# Altium PCB 7798-20-0228.PcbDoc (part 1 of 2)
Units mil, origin at the board's own origin, x right, y up, seen from the top; angles counter-clockwise.
Board outline 3346.46 x 2125.98 mil, 6 copper layers (Top Signal, Ground Plane (GND), Inner Layer 1, Inner Layer 2, Power Plane (VCC), Bottom Signal), stack 51.068 mil thick; 141 components, 100 nets, 613 pads, 275 vias.
Unrouted connection lines stored in the file: 12.
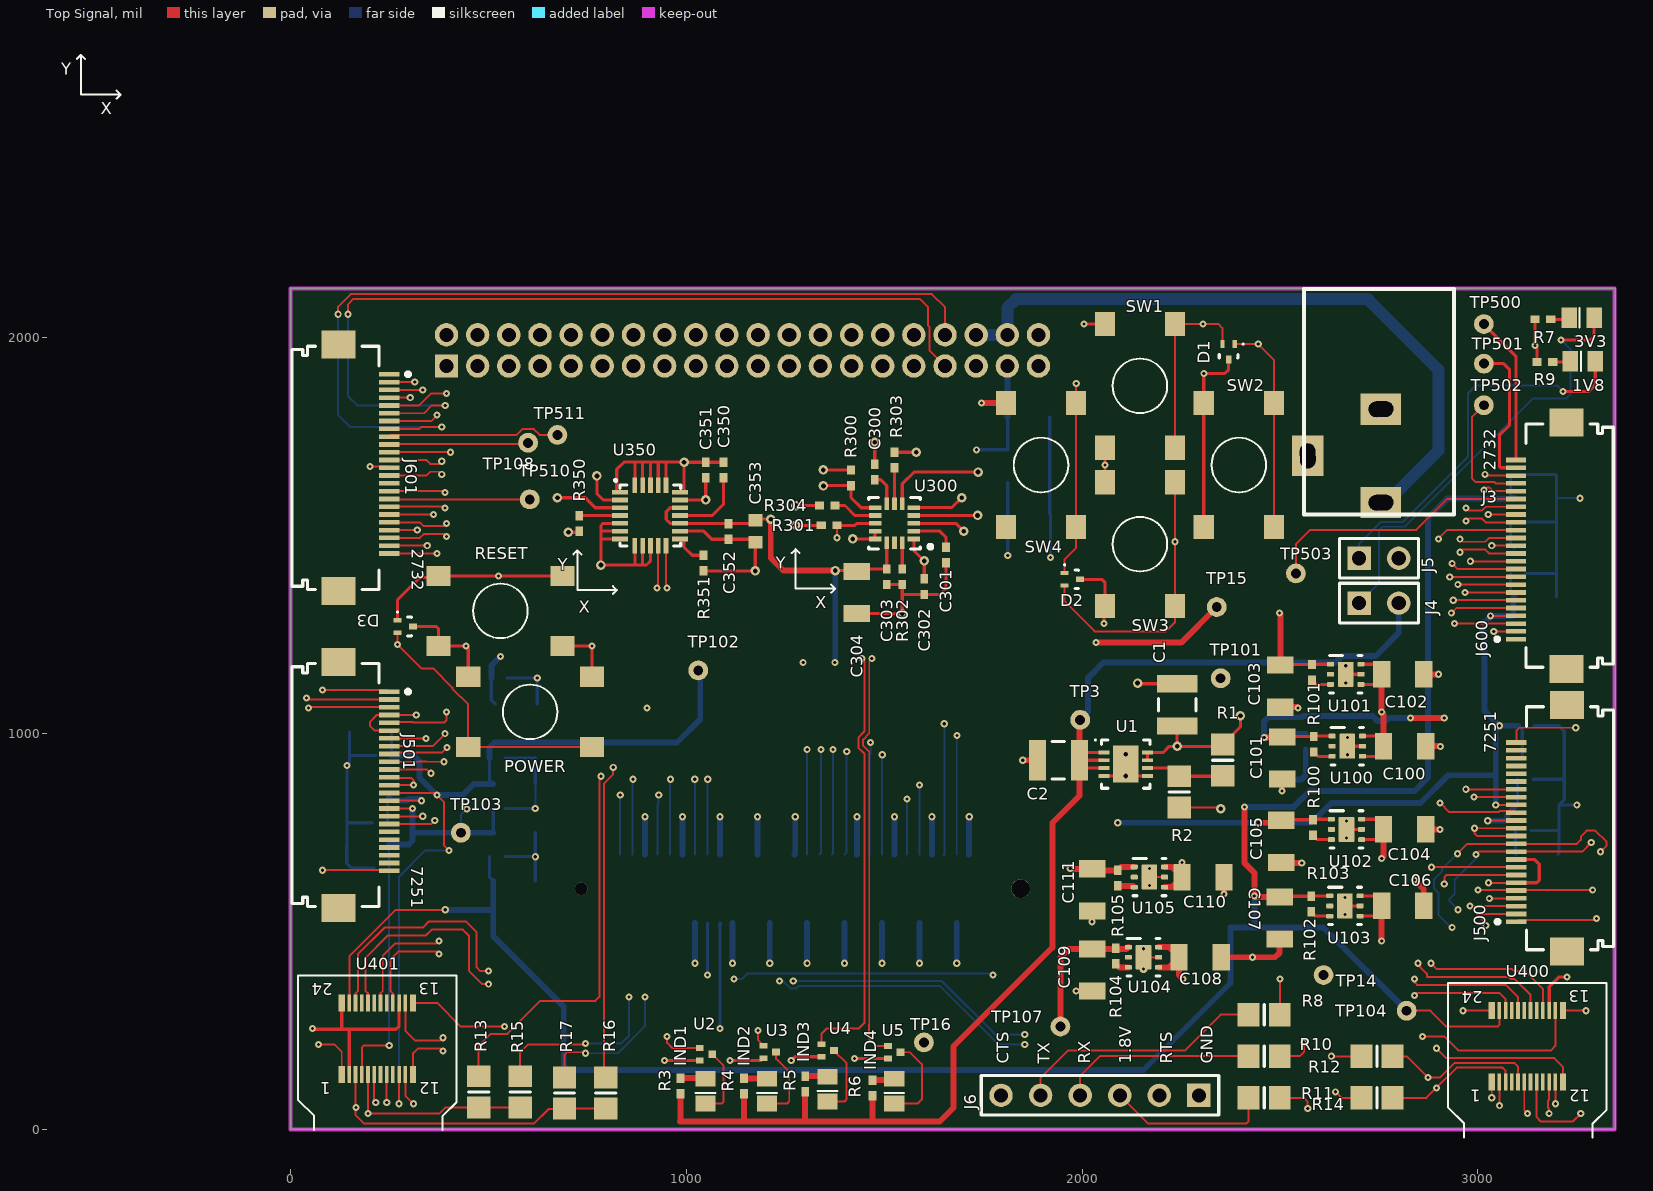
[diagram p0: Top Signal view]
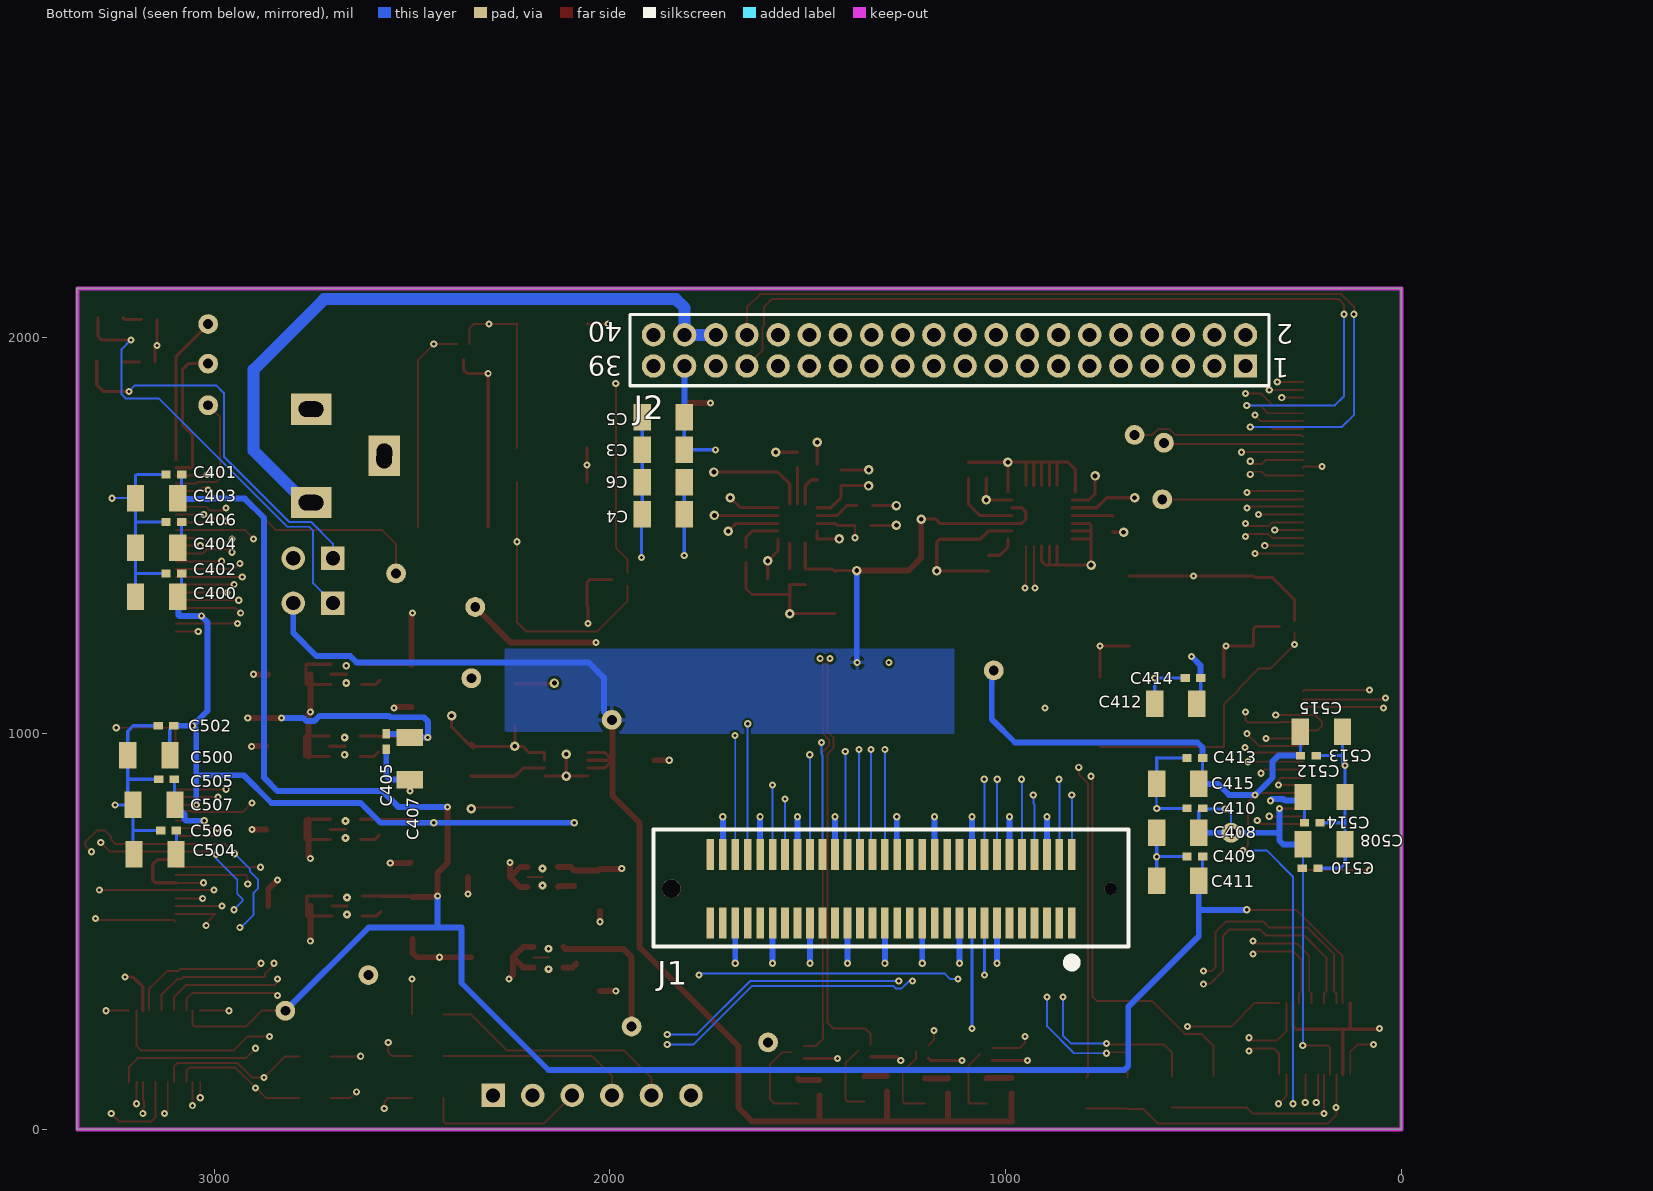
[diagram p1: Bottom Signal view, seen from below]
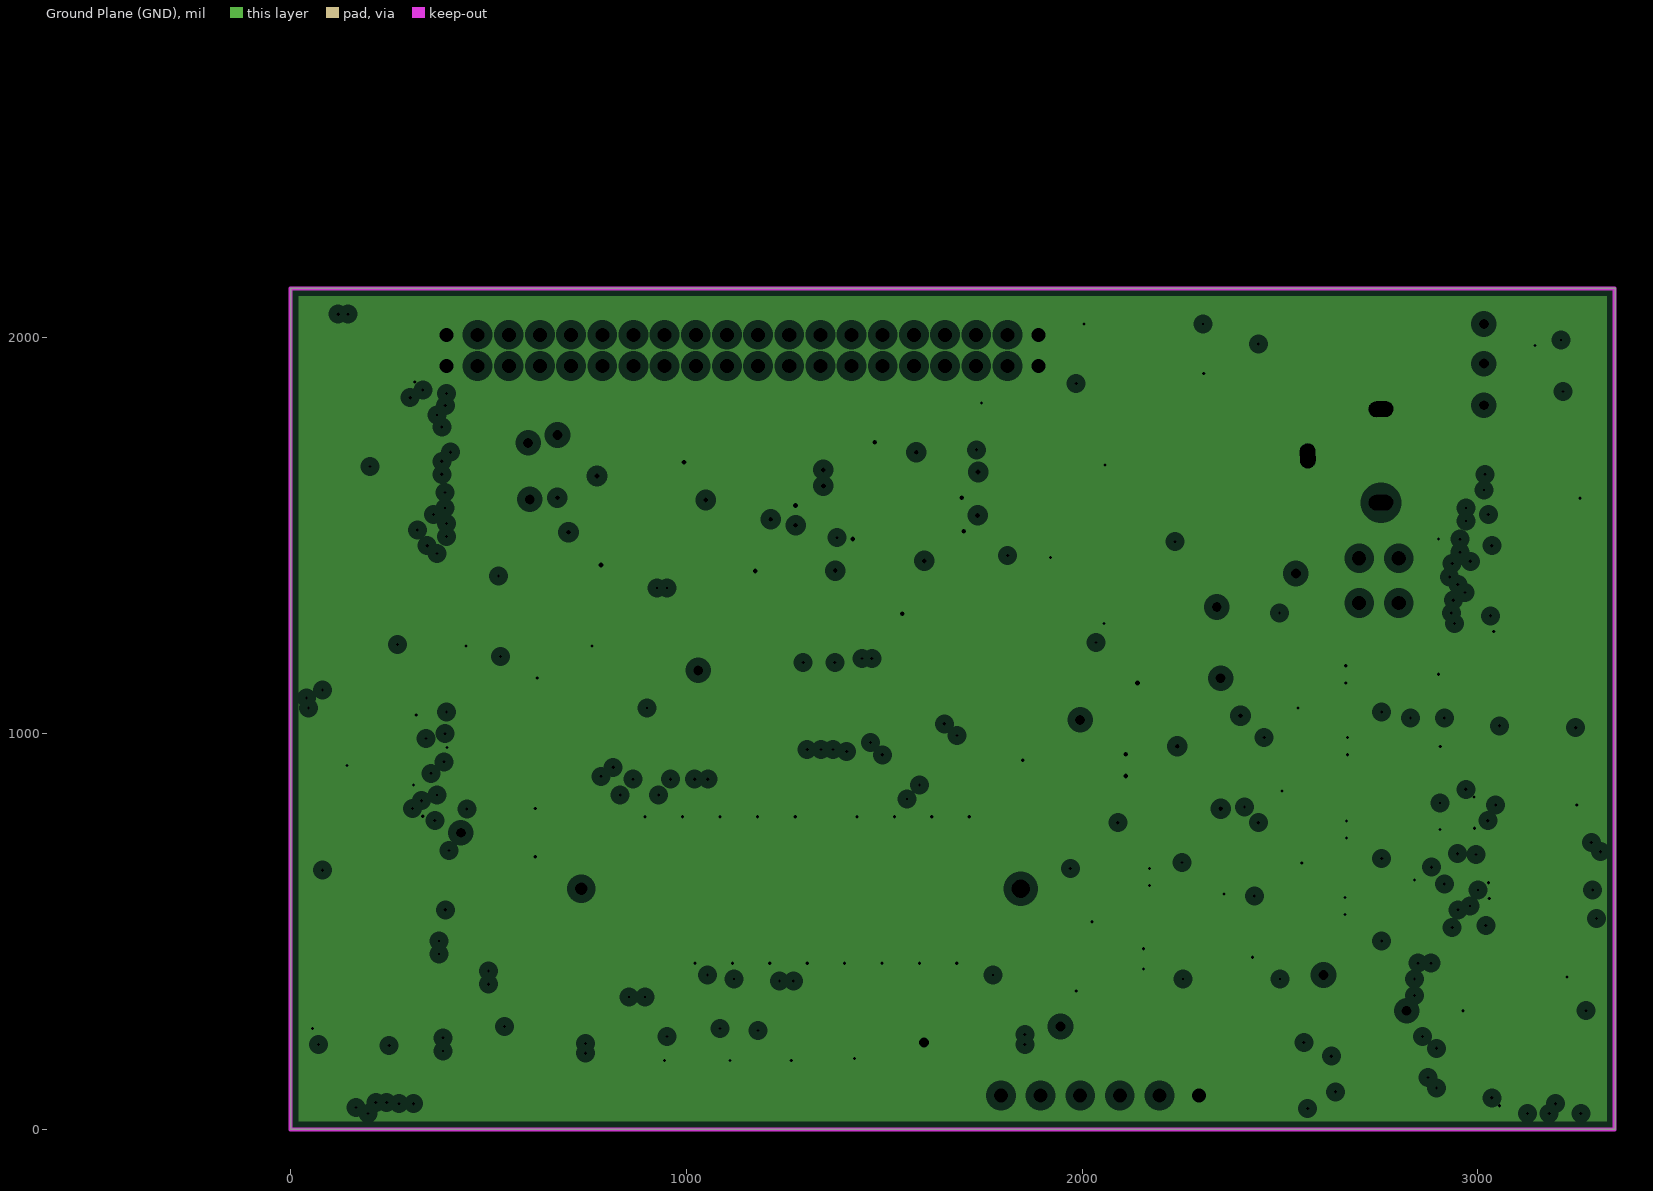
[diagram p2: Ground Plane (GND), clearances drawn from the general rule]
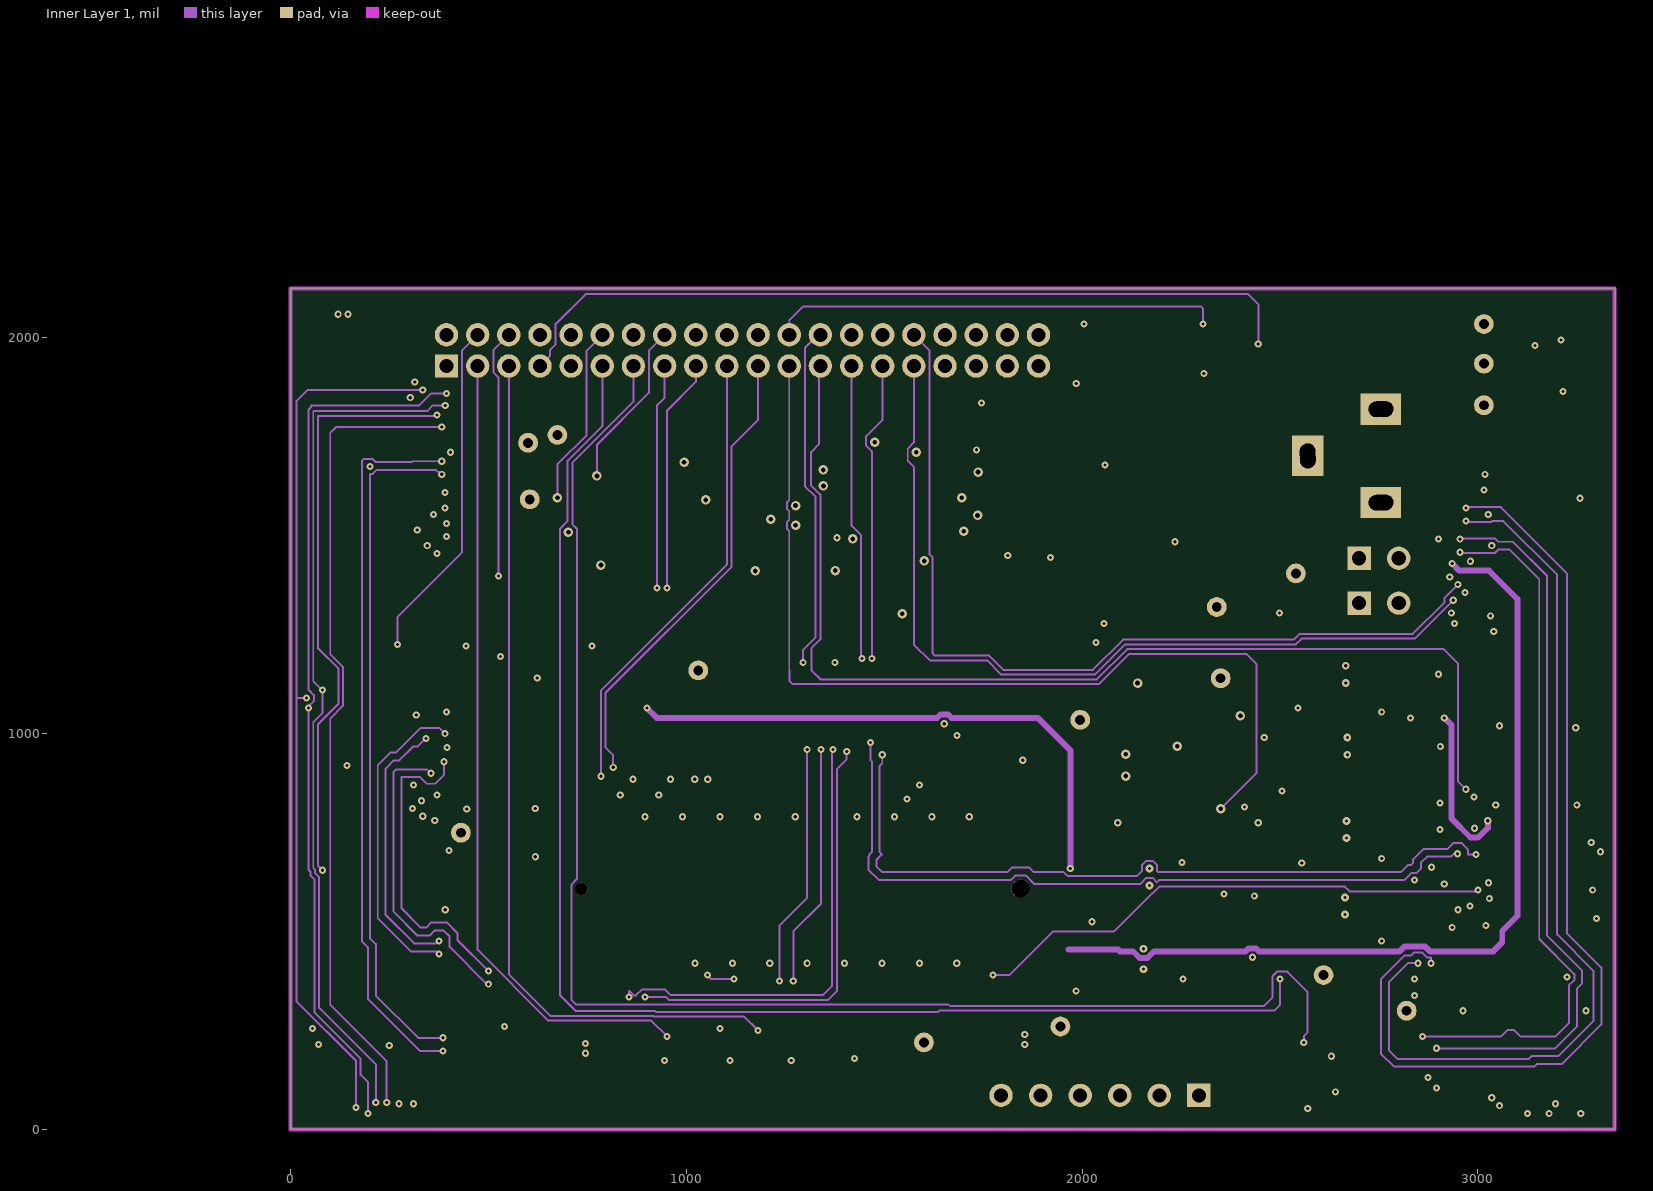
[diagram p3: Inner Layer 1]
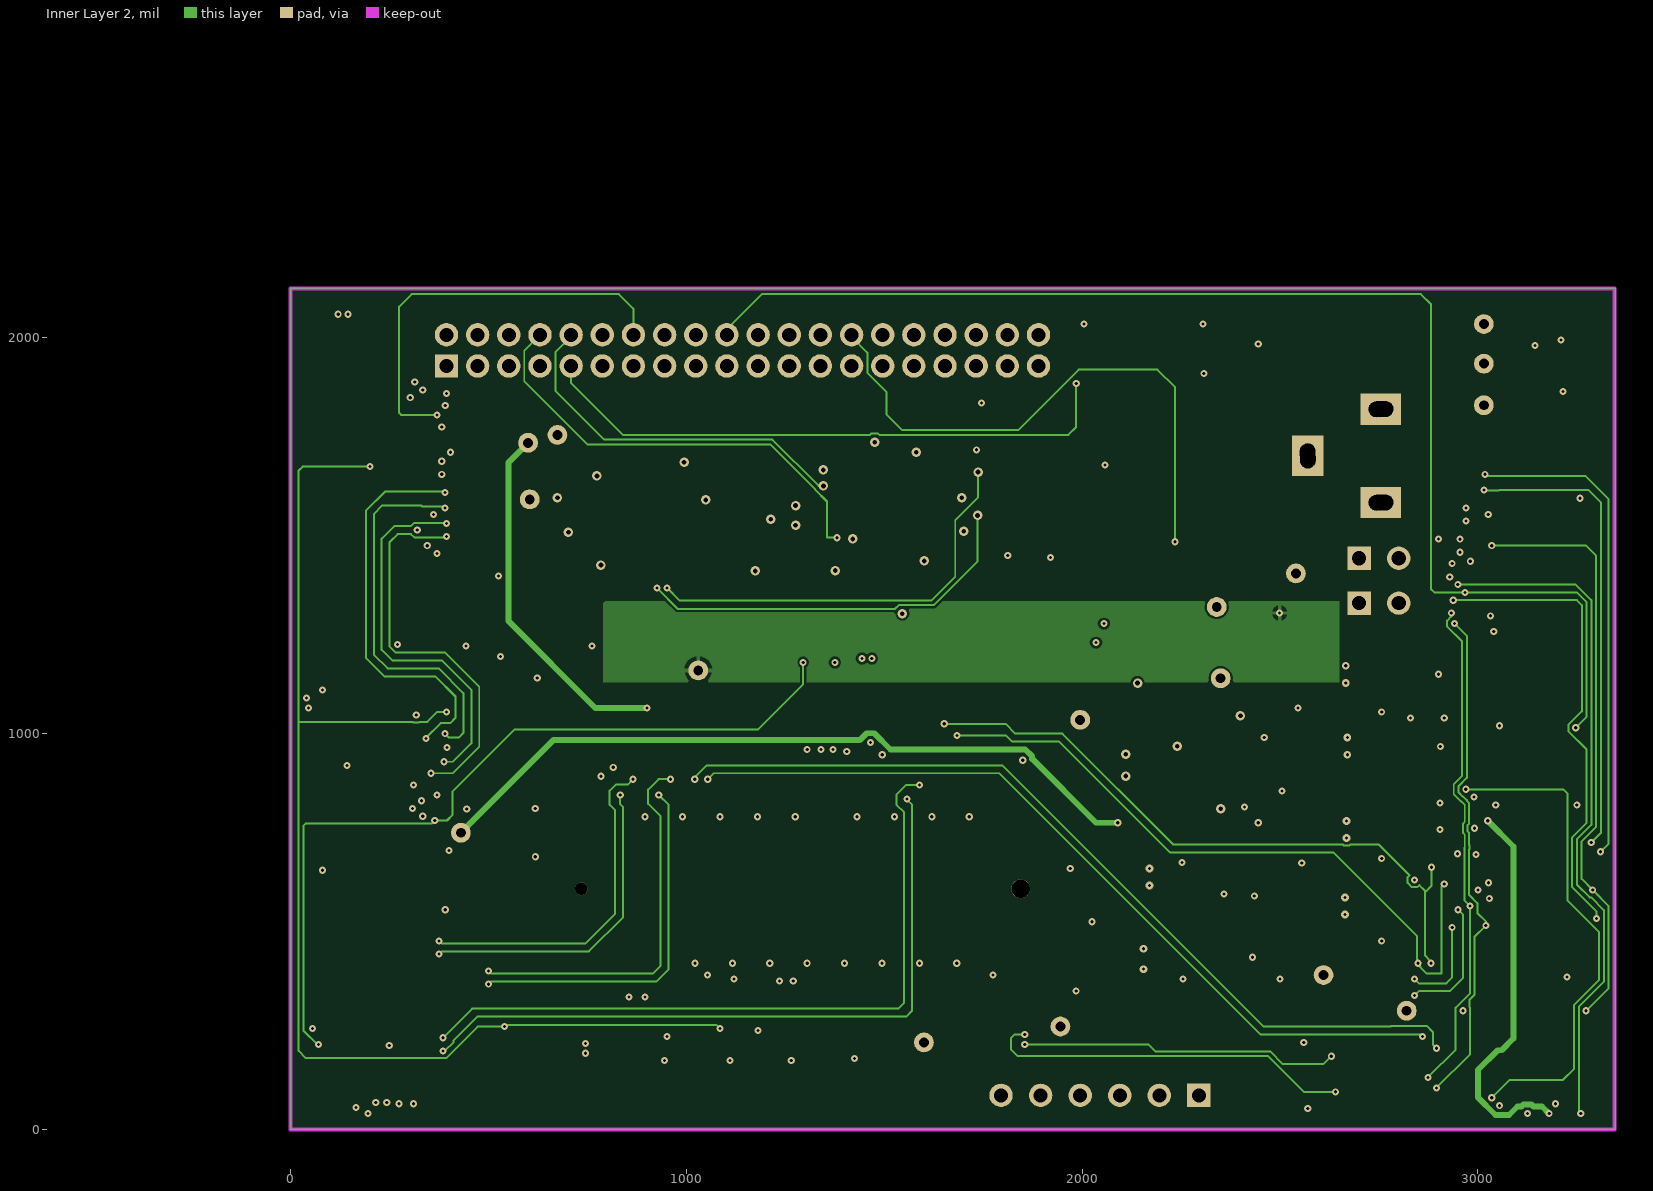
[diagram p4: Inner Layer 2]
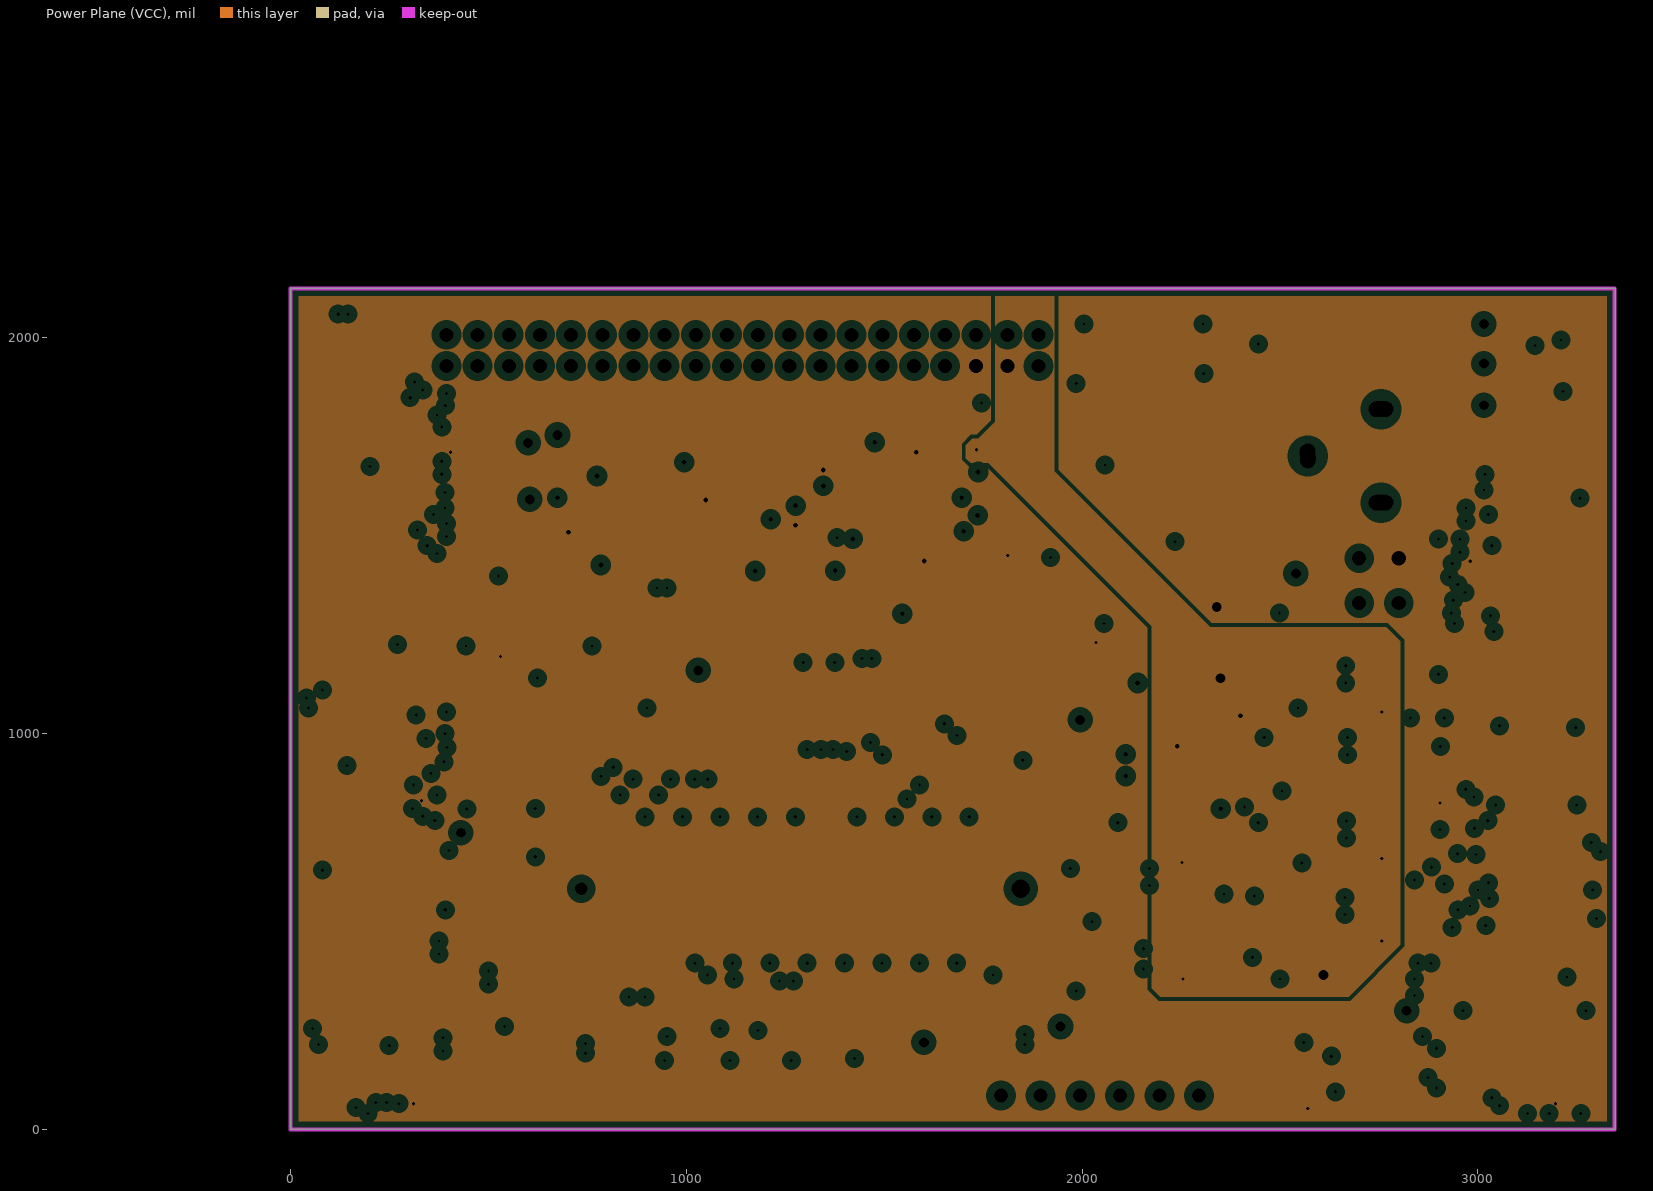
[diagram p5: Power Plane (VCC), clearances drawn from the general rule]

## Layer stack, top to bottom
Top Solder: solder mask 0.4, Solder Resist, Dk 3.5
Top Signal: signal copper 1.4
Dielectric 1: core 12.6, FR-4, Dk 4.8
Ground Plane (GND): plane copper 1.417, net sGND
Dielectric 3: prepreg 5, Dk 4.2
Inner Layer 1: signal copper 1.417
Dielectric 6: core 10, Dk 4.2
Inner Layer 2: signal copper 1.417
Dielectric 5: prepreg 5, Dk 4.2
Power Plane (VCC): plane copper 1.417, net sPWR_1V8
Dielectric 4: core 10, Dk 4.2
Bottom Signal: signal copper 1.4
Bottom Solder: solder mask 0.4, Solder Resist, Dk 3.5

## Board outline
0,0 3346.46,0 3346.46,2125.98 0,2125.98

## Design rules (kind name [scope] priority, off if disabled: settings)
AcuteAngle [All] p1: minimum=6.00000000000000E+0001 checktracksonly=FALSE
Clearance Clearance_2 [InNet('SCAM0_DATA0_N') OR InNet('SCAM0_DATA0_P') OR InNet('SCAM0_DATA1_N')OR InNet('SCAM0_DATA1_P') OR InNet('SCAM1_MCLOCK_N')OR InNet('SCAM1_MCLOCK_P') OR InNet('SCAM1_DATA0_N') OR InNet('SCAM1_DATA0_P')OR InNet('SCAM1_DATA1_N')OR InNet('SCAM1_DATA1_P') vs InNet('SCAM0_DATA0_N') OR InNet('SCAM0_DATA0_P') OR InNet('SCAM0_DATA1_N')OR InNet('SCAM0_DATA1_P') OR InNet('SCAM1_MCLOCK_N')OR InNet('SCAM1_MCLOCK_P') OR InNet('SCAM1_DATA0_N') OR InNet('SCAM1_DATA0_P')OR InNet('SCAM1_DATA1_N')OR InNet('SCAM1_DATA1_P')] p1: gap=15
Clearance Clearance_1 [(HasFootprint('SMD QFN 24_4X4MM 7/5') OR HasFootprint('FREE-QFN-16-3000X3000DE_V'))] p2: gap=8
Clearance [All] p3: gap=6
DiffPairsRouting DiffPair_SCAM0DiffPairsRouting [InDifferentialPair ('SCAM1_DATA0')] p1: maxlimit=10 minlimit=10 mostfreqgap=10 toplayer_minwidth=15 toplayer_maxwidth=15 toplayer_prefwidth=15 midlayer1_minwidth=15 midlayer1_maxwidth=15 midlayer1_prefwidth=15 midlayer2_minwidth=15 midlayer2_maxwidth=15 midlayer2_prefwidth=15 bottomlayer_minwidth=15 bottomlayer_maxwidth=15 bottomlayer_prefwidth=15 maxuncoupledlength=500
DiffPairsRouting [All] p2: maxlimit=17 minlimit=8 mostfreqgap=15 toplayer_minwidth=5 toplayer_maxwidth=10 toplayer_prefwidth=7 midlayer1_minwidth=5 midlayer1_maxwidth=10 midlayer1_prefwidth=7 midlayer2_minwidth=5 midlayer2_maxwidth=10 midlayer2_prefwidth=7 bottomlayer_minwidth=5 bottomlayer_maxwidth=10 bottomlayer_prefwidth=7 maxuncoupledlength=500
MatchedLengths DiffPair_SCAM0MatchedLengths [InDifferentialPair ('SCAM1_DATA0')] p1: tolerance=26 checknetsindiffpair=FALSE checkdiffpairvsdiffpair=TRUE checkxsignals=TRUE checkothers=TRUE
MatchedLengths [InDifferentialPairClass('All Differential Pairs')] p2: tolerance=26 checknetsindiffpair=TRUE checkdiffpairvsdiffpair=FALSE checkxsignals=FALSE checkothers=FALSE
MaxMinImpedance [InNet('SCAM0_DATA0_N') OR InNet('SCAM0_DATA0_P') OR InNet('SCAM0_DATA1_N')OR InNet('SCAM0_DATA1_P') OR InNet('SCAM1_MCLOCK_N')OR InNet('SCAM1_MCLOCK_P') OR InNet('SCAM1_DATA0_N') OR InNet('SCAM1_DATA0_P')OR InNet('SCAM1_DATA1_N')OR InNet('SCAM1_DATA1_P')] p1: minimum=10.00 maximum=110.0
MinimumAnnularRing [All] p1: minimumring=8
PlaneClearance [All] p1: clearance=20
PlaneConnect [All] p1: planeconnectstyle=Relief reliefexpansion=20 reliefentries=4 reliefconductorwidth=10 reliefairgap=10
PolygonConnect [All] p1: connectstyle=Relief reliefconductorwidth=10 reliefentries=4 polygonreliefangle="90 Angle" airgapwidth=10
RoutingVias [All] p1: holewidth=10 width=20 viastyle="Through Hole" minholewidth=8 minwidth=18 maxholewidth=12 maxwidth=24
SolderMaskExpansion [All] p1: expansion=4
Width Width_2 [InNet('SCAM0_DATA0_N') OR InNet('SCAM0_DATA0_P') OR InNet('SCAM0_DATA1_N')OR InNet('SCAM0_DATA1_P') OR InNet('SCAM1_MCLOCK_N')OR InNet('SCAM1_MCLOCK_P') OR InNet('SCAM1_DATA0_N') OR InNet('SCAM1_DATA0_P')OR InNet('SCAM1_DATA1_N')OR InNet('SCAM1_DATA1_P')] p1: maxlimit=10 minlimit=5 preferedwidth=7
Width Width_1 [InNet('sSYS_DCIN')] p2: maxlimit=30 minlimit=8 preferedwidth=8
Width [All] p3: maxlimit=15 minlimit=5 preferedwidth=8
27 further rules are at their usual default settings.

## Classes and differential pairs
differential pair SCAM0_DATA0: +SCAM0_DATA0_P -SCAM0_DATA0_N
differential pair SCAM0_DATA1: +SCAM0_DATA1_P -SCAM0_DATA1_N
differential pair SCAM1_DATA1: +SCAM1_DATA1_P -SCAM1_DATA1_N
differential pair SCAM1_MCLOCK: +SCAM1_MCLOCK_P -SCAM1_MCLOCK_N

## Components (designator, comment, footprint, x,y, rotation, side; value= is the part's Value field where it differs from the comment)
1V8 "LTST-C171GKT" 0805 3265,1941 r180 top
3V3 "LTST-C171GKT" 0805 3262,2051 r180 top
C1 "GRM32ER71H106KA12L" 1210 2240,1073 r270 top
C2 "GRM32ER71H106KA12L" 1210 1940,932.84 r0 top
C3 "GRM31CR71H475KA12L" 1206 1865,1717.28 r180 bottom
C4 "GRM31CR71H475KA12L" 1206 1865,1555 r180 bottom
C5 "GRM31CR71H475KA12L" 1206 1865,1800 r180 bottom
C6 "GRM31CR71H475KA12L" 1206 1865,1635 r180 bottom
C100 "GRM31CR71H475KA12L" 1206 2815,968.43 r180 top
C101 "GRM31CR71H475KA12L" 1206 2505,938.35 r90 top
C102 "GRM31CR71H475KA12L" 1206 2810,1150.06 r180 top
C103 "GRM31CR71H475KA12L" 1206 2501,1120.06 r90 top
C104 "GRM31CR71H475KA12L" 1206 2815,758 r180 top
C105 "GRM31CR71H475KA12L" 1206 2503,728 r90 top
C106 "GRM31CR71H475KA12L" 1206 2810,565 r180 top
C107 "GRM31CR71H475KA12L" 1206 2499,534.58 r90 top
C108 "GRM31CR71H475KA12L" 1206 2298.15,435 r180 top
C109 "GRM31CR71H475KA12L" 1206 2025,403 r90 top
C110 "GRM31CR71H475KA12L" 1206 2305,637.72 r180 top
C111 "GRM31CR71H475KA12L" 1206 2025,605.38 r90 top
C300 "GRM155R71A104KA01D" 0402 1475.79,1661.46 r90 top
C301 "GRM155R71A104KA01D" 0402 1655.79,1451.46 r270 top
C302 "GRM155R71A104KA01D" 0402 1600.79,1371.46 r90 top
C303 "GRM155R71A104KA01D" 0402 1506.1,1396.46 r90 top
C304 "GRM31CR71H475KA12L" 1206 1430.79,1356.46 r90 top
C350 "GRM155R71A104KA01D" 0402 1094,1666.15 r90 top
C351 "GRM155R71A104KA01D" 0402 1049,1666.15 r270 top
C352 "GRM155R71A104KA01D" 0402 1106.13,1511.15 r90 top
C353 "GRM188R71A105KA61J" 0603 1174,1511.78 r270 top
C400 "GRM31CR71H475KA12L" 1206 3145.12,1346.15 r0 bottom
C401 "GRM155R71A104KA01D" 0402 3101.81,1655 r180 bottom
C402 "GRM155R71A104KA01D" 0402 3101.81,1405 r180 bottom
C403 "GRM31CR71H475KA12L" 1206 3145.12,1595 r0 bottom
C404 "GRM31CR71H475KA12L" 1206 3145.12,1470 r0 bottom
C405 "GRM155R71A104KA01D" 0402 2565,980 r90 bottom
C406 "GRM155R71A104KA01D" 0402 3101.81,1535 r180 bottom
C407 "GRM31CR71H475KA12L" 1206 2505,936.85 r270 bottom
C408 "GRM31CR71H475KA12L" 1206 565,749.61 r0 bottom
C409 "GRM155R71A104KA01D" 0402 521.69,690 r180 bottom
C410 "GRM155R71A104KA01D" 0402 521.69,811.34 r180 bottom
C411 "GRM31CR71H475KA12L" 1206 565,628.31 r0 bottom
C412 "GRM31CR71H475KA12L" 1206 569.92,1075.37 r0 bottom
C413 "GRM155R71A104KA01D" 0402 521.69,938.31 r180 bottom
C414 "GRM155R71A104KA01D" 0402 526.61,1140.37 r180 bottom
C415 "GRM31CR71H475KA12L" 1206 565,873.31 r0 bottom
C500 "GRM31CR71H475KA12L" 1206 3165,945 r0 bottom
C502 "GRM155R71A104KA01D" 0402 3121.69,1020 r180 bottom
C504 "GRM31CR71H475KA12L" 1206 3149.37,695.43 r0 bottom
C505 "GRM155R71A104KA01D" 0402 3120,885 r180 bottom
C506 "GRM155R71A104KA01D" 0402 3115,755.43 r180 bottom
C507 "GRM31CR71H475KA12L" 1206 3151.85,820 r0 bottom
C508 "GRM31CR71H475KA12L" 1206 195.38,720 r180 bottom
C510 "GRM155R71A104KA01D" 0402 230.38,660 r0 bottom
C512 "GRM31CR71H475KA12L" 1206 195,840 r180 bottom
C513 "GRM155R71A104KA01D" 0402 235,944.45 r0 bottom
C514 "GRM155R71A104KA01D" 0402 225,775 r0 bottom
C515 "GRM31CR71H475KA12L" 1206 202.14,1004.45 r180 bottom
D1 "ESD7C5.0DT5G" ONSC-SOT-723-3-631AA-01_V 2370,1965 r270 top
D2 "ESD7C5.0DT5G" ONSC-SOT-723-3-631AA-01_V 1975,1390 r0 top
D3 "ESD7C5.0DT5G" ONSC-SOT-723-3-631AA-01_V 289.29,1270.75 r0 top
IND1 "LTST-C171GKT" 0805 1048,97 r270 top
IND2 "LTST-C171GKT" 0805 1203.33,97 r270 top
IND3 "LTST-C171GKT" 0805 1356.67,102 r270 top
IND4 "LTST-C171GKT" 0805 1525,97 r270 top
J1 "61083-064402LF" 61083-064402LF 832.68,521.65 r0 bottom locked
J2 "TMMH-120-01-F-D" HDR2X20.Metric 393.7,1929.13 r0 bottom locked
J3 "PJ-102AH" PJ-102AH 2755,1701.89 r0 top
J4 "XJ8B-0211" HDR1X2 2700,1330 r0 top
J5 "XJ8B-0211" HDR1X2 2700,1443.32 r0 top
J6 "DNP" HDR1X6 2295,86 r180 top
J500 "FH12-24S-0.5SH" FH12-24S-0.5SH 3161.02,761.02 r90 top locked
J501 "FH12-24S-0.5SH" FH12-24S-0.5SH 185,870 r270 top locked
J600 "FH12-24S-0.5SH" FH12-24S-0.5SH 3160,1475 r90 top locked
J601 "FH12-24S-0.5SH" FH12-24S-0.5SH 185,1671.89 r270 top locked
POWER "PTS645SH50SMTR92 LFS" "PTS645SH50SMTR92 LFS" 605,1055 r0 top
R1 "CRCW08050000Z0EA" 6-0805_M 2355,933 r90 top
R2 "CRCW08050000Z0EA" 6-0805_M 2245,853 r270 top
R3 "CRCW0402560RFKEDHP" 0402 985,110 r270 top
R4 "CRCW0402560RFKEDHP" 0402 1145.79,110 r270 top
R5 "CRCW0402560RFKEDHP" 0402 1300,115 r270 top
R6 "CRCW0402560RFKEDHP" 0402 1470,105 r270 top
R7 "CRCW0402560RFKEDHP" 0402 3164,2047 r180 top
R8 "CRCW08050000Z0EA" 6-0805_M 2460,290 r0 top
R9 "CRCW040256R0FKED" 0402 3169,1939 r180 top
R10 "CRCW08050000Z0EA" 6-0805_M 2460,185 r0 top
R11 "CRCW08050000Z0EA" 6-0805_M 2460,80 r0 top
R12 "CRCW08050000Z0EA" 6-0805_M 2745,184.63 r0 top
R13 "CRCW08050000Z0EA" 6-0805_M 475,95 r270 top
R14 "CRCW08050000Z0EA" 6-0805_M 2745,80 r0 top
R15 "CRCW08050000Z0EA" 6-0805_M 580,95 r270 top
R16 "CRCW08050000Z0EA" 6-0805_M 796,92 r270 top
R17 "CRCW08050000Z0EA" 6-0805_M 692,92 r270 top
R100 "CRCW040210K0FKEDHP" 0402 2585,973.35 r270 top
R101 "CRCW040210K0FKEDHP" 0402 2581,1155.06 r270 top
R102 "CRCW040210K0FKEDHP" 0402 2583,763 r270 top
R103 "CRCW040210K0FKEDHP" 0402 2579,569.58 r270 top
R104 "CRCW040210K0FKEDHP" 0402 2085,438.5 r270 top
R105 "CRCW040210K0FKEDHP" 0402 2090,635 r270 top
R300 "CRCW040210K0FKED" 0402 1415.79,1646.46 r270 top
R301 "CRCW040210K0FKED" 0402 1360.79,1526.46 r0 top
R302 "CRCW040210K0FKED" 0402 1545.47,1396.46 r90 top
R303 "CRCW040210K0FKED" 0402 1525.79,1691.46 r90 top
R304 "CRCW040210K0FKED" 0402 1355.79,1576.46 r180 top
R350 "CRCW040210K0FKED" 0402 729,1530.83 r90 top
R351 "CRCW040210K0FKED" 0402 1043.37,1431.15 r270 top
RESET "PTS645SH50SMTR92 LFS" "PTS645SH50SMTR92 LFS" 530,1310.17 r180 top
SW1 "PTS645SH50SMTR92 LFS" "PTS645SH50SMTR92 LFS" 2146,1878.89 r90 top
SW2 "PTS645SH50SMTR92 LFS" "PTS645SH50SMTR92 LFS" 2396,1678.89 r90 top
SW3 "PTS645SH50SMTR92 LFS" "PTS645SH50SMTR92 LFS" 2146,1478.89 r90 top
SW4 "PTS645SH50SMTR92 LFS" "PTS645SH50SMTR92 LFS" 1896,1678.89 r90 top
TP3 "TP" TP_TH 1995,1035 r90 top
TP14 "TP" TP_TH 2610,390 r90 top
TP15 "TP" TP_TH 2340,1320 r90 top
TP16 "TP" TP_TH 1600,220 r90 top
TP101 "TP" TP_TH 2350,1140 r90 top
TP102 "TP" TP_TH 1030,1160 r90 top
TP103 "TP" TP_TH 430,749.61 r90 top
TP104 "TP" TP_TH 2820,300 r90 top
TP107 "TP" TP_TH 1945,260 r90 top
TP108 "TP" TP_TH 600,1735 r90 top
TP500 "TP" TP_TH 3015,2035 r90 top
TP501 "TP" TP_TH 3015,1935 r90 top
TP502 "TP" TP_TH 3015,1830 r90 top
TP503 "TP" TP_TH 2540,1405 r90 top
TP510 "TP" TP_TH 604.02,1592.13 r90 top
TP511 "TP" TP_TH 674,1755 r90 top
U1 "LT1965EDD-3.3#TRPBF" "LT-DD-8_V - MOD" 2110,923 r0 top
U2 "RUM002N05T2L" RUM002N05T2L 1049.25,190 r270 top
U3 "RUM002N05T2L" RUM002N05T2L 1210.75,195.75 r270 top
U4 "RUM002N05T2L" RUM002N05T2L 1356.85,199.25 r270 top
U5 "RUM002N05T2L" RUM002N05T2L 1525,195 r270 top
U100 "LP5912-1.5" DRV0006A 2670,968.35 r0 top
U101 "LP5912-1.5" DRV0006A 2666,1150.06 r0 top
U102 "LP5912-2.8" DRV0006A 2668,758 r0 top
U103 "LP5912-2.8" DRV0006A 2664,564.58 r0 top
U104 "LP5912-1.2" DRV0006A 2155,435 r0 top
U105 "LP5912-1.2" DRV0006A 2170,637.72 r0 top
U300 "FXOS8700CQR1" FREE-QFN-16-3000X3000DE_V 1525.79,1531.46 r180 top
U350 "FXAS21002C" "SMD QFN 24_4X4MM 7/5" 909,1551.15 r0 top
U400 "AXK724147G" AXK724147G 3125,210 r180 top
U401 "AXK724147G" AXK724147G 219,229 r180 top

## Footprints (in the part's own frame and the unit in brackets; to place one, negate y for a bottom-side part, rotate by r counter-clockwise, add the part's x,y. Pads: shape width x height; smd on the part's side, far side on the other; paste and mask are expansions set on the pad)
6-0805_M [mm] "Chip Resistor, Body 2.0x1.2mm, IPC Low Density"
  rect 1.4x1.5 smd: 1(-1,0) 2(1,0)
  silkscreen extent 0,-0.65 0,0.65, body extent -1.07,-0.7 1.07,0.7, height 0.7
0402 [mm] "Chip Capacitor, Body 1.0x0.5mm, IPC High Density"
  rect 0.6x0.5 smd: 1(-0.5,0) 2(0.5,0)
  body extent -0.55,-0.3 0.55,0.3, height 1.3
0603 [mm] "Chip Capacitor, Body 1.6x0.8mm, IPC High Density"
  rect 0.8x0.9 smd: 1(-0.7,0) 2(0.7,0)
  body extent -0.87,-0.48 0.87,0.48, height 1.3
0805 [mm]
  rect 1x1.3 smd: 1(-0.8,0) 2(0.8,0)
  silkscreen extent 0.13,-0.64 0.13,0.64, body extent -1.07,-0.64 1.07,0.76, height 0.7
1206 [mm] "Chip Capacitor, Body 3.2x1.6mm, IPC High Density"
  rect 1.1x1.7 smd: 1(-1.35,0) 2(1.35,0)
  body extent -1.7,-0.9 1.7,0.9, height 1.3
1210 [mm] "Chip Capacitor, Body 3.2x2.5mm, IPC High Density"
  rect 1.1x2.6 smd: 1(-1.35,0) 2(1.35,0)
  silkscreen extent -0.4,-1.2 0.4,1.2, body extent -1.7,-1.35 1.7,1.35, height 1.3
61083-064402LF [mm] "2x30 pin metric"
  round 0.8 hole 0.8 unplated: 0(-2.5,-2.2)
  round 1.2 hole 1.2 unplated: 0(25.7,-2.2)
  rect 0.5x2 smd: 1(0,0) 2(0,-4.4) 3(0.8,0) 4(0.8,-4.4) 5(1.6,0) 6(1.6,-4.4) 7(2.4,0) 8(2.4,-4.4) 9(3.2,0) 10(3.2,-4.4) 11(4,0) 12(4,-4.4) 13(4.8,0) 14(4.8,-4.4) 15(5.6,0) 16(5.6,-4.4) 17(6.4,0) 18(6.4,-4.4) 19(7.2,0) 20(7.2,-4.4) 21(8,0) 22(8,-4.4) 23(8.8,0) 24(8.8,-4.4) 25(9.6,0) 26(9.6,-4.4) 27(10.4,0) 28(10.4,-4.4) 29(11.2,0) 30(11.2,-4.4) 31(12,0) 32(12,-4.4) 33(12.8,0) 34(12.8,-4.4) 35(13.6,0) 36(13.6,-4.4) 37(14.4,0) 38(14.4,-4.4) 39(15.2,0) 40(15.2,-4.4) 41(16,0) 42(16,-4.4) 43(16.8,0) 44(16.8,-4.4) 45(17.6,0) 46(17.6,-4.4) 47(18.4,0) 48(18.4,-4.4) 49(19.2,0) 50(19.2,-4.4) 51(20,0) 52(20,-4.4) 53(20.8,0) 54(20.8,-4.4) 55(21.6,0) 56(21.6,-4.4) 57(22.4,0) 58(22.4,-4.4) 59(23.2,0) 60(23.2,-4.4)
  silkscreen extent -3.64,-6.01 26.84,2.79, body extent -3.3,-5.16 26.5,0.84, height 7.75
AXK724147G [mm]
  rect 0.4x1.1 smd: 1(2.285,2.3) 12(-2.285,2.3) 13(-2.285,-2.3) 24(2.285,-2.3)
  rect 0.23x1.1 smd: 2(1.8,2.3) 3(1.4,2.3) 4(1,2.3) 5(0.6,2.3) 6(0.2,2.3) 7(-0.2,2.3) 8(-0.6,2.3) 9(-1,2.3) 10(-1.4,2.3) 11(-1.8,2.3) 14(-1.8,-2.3) 15(-1.4,-2.3) 16(-1,-2.3) 17(-0.6,-2.3) 18(-0.2,-2.3) 19(0.2,-2.3) 20(0.6,-2.3) 21(1,-2.3) 22(1.4,-2.3) 23(1.8,-2.3)
  body extent -3.55,-2.55 3.55,2.55, height 1.5
DRV0006A [mm]
  rrect33% 0.45x0.3 smd: 1(-0.975,0.65) 2(-0.975,0) 3(-0.975,-0.65) 4(0.975,-0.65) 5(0.975,0) 6(0.975,0.65)
  rrect14% 1x0.7 on Top Paste: 7(0,-0.45) 7(0,0.45)
  rrect10% 1x1.6 smd paste-0.5: 7(0,0)
  silkscreen extent -1.05,-1.2 1.05,1.2, body extent -1.05,-1.05 1.05,1.05, height 0.81
FH12-24S-0.5SH [mm]
  rect 1.8x2.2 smd: 0(-7.9,-1.625) 0(7.9,-1.625)
  rect 0.3x1.3 smd: 1(-6,1.625) 2(-5.5,1.625) 3(-5,1.625) 4(-4.5,1.625) 5(-4,1.625) 6(-3.5,1.625) 7(-3,1.625) 8(-2.5,1.625) 9(-2,1.625) 10(-1.5,1.625) 11(-1,1.625) 12(-0.5,1.625) 13(0,1.625) 14(0.5,1.625) 15(1,1.625) 16(1.5,1.625) 17(2,1.625) 18(2.5,1.625) 19(3,1.625) 20(3.5,1.625) 21(4,1.625) 22(4.5,1.625) 23(5,1.625) 24(5.5,1.625)
  silkscreen extent -7.8,-4.62 7.8,2.95, body extent -8.3,-4.19 7.8,2.21, height 2.14
FREE-QFN-16-3000X3000DE_V [mm] "QFN, 16-Leads, Body 3.00x3.00mm, Pitch 0.50mm"
  rect 0.8x0.3 smd: 1(-1.25,1) 2(-1.25,0.5) 3(-1.25,0) 4(-1.25,-0.5) 5(-1.25,-1) 9(1.25,-1) 10(1.25,-0.5) 11(1.25,0) 12(1.25,0.5) 13(1.25,1)
  rect 0.3x0.8 smd: 6(-0.5,-1.25) 7(0,-1.25) 8(0.5,-1.25) 14(0.5,1.25) 15(0,1.25) 16(-0.5,1.25)
  silkscreen extent -2.43,-1.65 1.65,1.65, body extent -1.5,-1.5 1.5,1.5, height 1.25
HDR1X2 [mm] "Connector; Header; 2 Position"
  rect 1.5x1.5 hole 0.9: 1(0,0)
  round 1.5 hole 0.9: 2(2.54,0)
  silkscreen extent -1.27,-1.27 3.81,1.27
HDR1X6 [mm] "Connector; Header; 6 Position"
  rect 1.5x1.5 hole 0.9: 1(0,0)
  round 1.5 hole 0.9: 2(2.54,0) 3(5.08,0) 4(7.62,0) 5(10.16,0) 6(12.7,0)
  silkscreen extent -1.27,-1.27 13.97,1.27
HDR2X20.Metric [mm] "Connector; Header; 2x20 Position"
  rect 1.5x1.5 hole 0.9: 1(0,0)
  round 1.5 hole 0.9: 2(0,-2) 3(2,0) 4(2,-2) 5(4,0) 6(4,-2) 7(6,0) 8(6,-2) 9(8,0) 10(8,-2) 11(10,0) 12(10,-2) 13(12,0) 14(12,-2) 15(14,0) 16(14,-2) 17(16,0) 18(16,-2) 19(18,0) 20(18,-2) 21(20,0) 22(20,-2) 23(22,0) 24(22,-2) 25(24,0) 26(24,-2) 27(26,0) 28(26,-2) 29(28,0) 30(28,-2) 31(30,0) 32(30,-2) 33(32,0) 34(32,-2) 35(34,0) 36(34,-2) 37(36,0) 38(36,-2) 39(38,0) 40(38,-2)
  silkscreen extent -1.5,-3.3 39.5,1.27, body extent -1.02,-3.05 38.98,0.94, height 5.31
"LT-DD-8_V - MOD" [mm] "SON, 8-Leads, Body 3x3mm, Pitch 0.5mm, Thermal Pad 1.65x2.38 mm, IPC Low Density"
  rect 0.7x0.25 smd mask+0.102: 1(-1.4,0.75) 2(-1.4,0.25) 3(-1.4,-0.25) 4(-1.4,-0.75) 5(1.4,-0.75) 6(1.4,-0.25) 7(1.4,0.25) 8(1.4,0.75)
  rect 1.65x2.38 smd mask+0.102: 9(0,0)
  silkscreen extent -2,-1.55 1.55,1.6, body extent -1.48,-1.52 1.52,1.48, height 0.8
ONSC-SOT-723-3-631AA-01_V [mm] "SOT223, 3-Leads, Body 1.2x0.8mm, Pitch 0.4mm"
  rect 0.52x0.27 smd: 1(-0.49,0.4) 2(-0.49,-0.4)
  rect 0.52x0.36 smd: 3(0.49,0)
  silkscreen extent -0.54,-0.6 0.4,0.98, body extent -0.4,-0.6 0.4,0.6, height 0.55
PJ-102AH [mm] "2.1 mm DC POWER JACK"
  rect 2.6x2 hole 1 slot 1.6 at 1 deg: 1(0,-3) 2(0,3)
  rect 2x2.6 hole 1 slot 1.6 at 91 deg: 3(-4.7,0)
  silkscreen extent -4.95,-3.76 4.7,10.72, body extent -4.83,-3.72 4.57,10.68, height 11.5
"PTS645SH50SMTR92 LFS" [mm] "SWITCH TACTILE SPST-NO 0.05A 12V"
  rect 1.55x1.3 smd: 1(-3.975,2.25) 2(3.975,2.25) 3(-3.975,-2.25) 4(3.975,-2.25)
  silkscreen extent -1.75,-1.75 1.75,1.75, body extent -4.57,-3 4.43,3, height 4.1
RUM002N05T2L [mm]
  rect 0.37x0.5 smd: 1(-0.4,-0.4) 2(0.4,-0.4)
  rect 0.47x0.5 smd: 3(0,0.4)
  body extent -0.64,-0.56 0.61,0.49, height 0.45
"SMD QFN 24_4X4MM 7/5" [mm]
  rect 1x0.3 smd: 1(-1.95,1.5) 2(-1.95,1) 3(-1.95,0.5) 4(-1.95,0) 5(-1.95,-0.5) 6(-1.95,-1) 7(-1.95,-1.5) 13(1.9,-1.5) 14(1.9,-1) 15(1.9,-0.5) 16(1.9,0) 17(1.9,0.5) 18(1.9,1) 19(1.9,1.5)
  rect 0.3x1 smd: 8(-1,-1.95) 9(-0.5,-1.95) 10(0,-1.95) 11(0.5,-1.95) 12(1,-1.95) 20(1,1.95) 21(0.5,1.95) 22(0,1.95) 23(-0.5,1.95) 24(-1,1.95)
  silkscreen extent -2.27,-1.95 1.95,2.3, body extent -2,-2.01 2.01,2, height 0.9
TP_TH [mil]
  round 50 hole 25: 1(0,0)

## Part data
1V8 3V3 IND1 IND2 IND3 IND4: "LED"
C1 C2: library part GRM32ER71HxxxKdddd, "-55-125C, 1005, 50V, X7R, ±10%"
C3 C4 C5 C6 C100 C101 C102 C103 C104 C105 C106 C107 C108 C109 C110 C111 C304 C400 C403 C404 C407 C408 C411 C412 C415 C500 C504 C507 C508 C512 C515: library part GRM31CR71HxxxKdddd, "-55-125C, 3216, 50V, X7R, ±10%"
C300 C301 C302 C303 C350 C351 C352 C401 C402 C405 C406 C409 C410 C413 C414 C502 C505 C506 C510 C513 C514: library part GRM155R71AxxxKdddd, "-55-125C, 1005, 10V, X7R, ±10%"
C353: library part GRM188R71AxxxKdddd, "-55-125C, 1608, 10V, X7R, ±10%"
D1 D2 D3: library part CMP-1063-00208-1, "Transient Voltage Suppressor, Micro-Packaged Diode for ESD Protection, 3-Pin SOT-723, Pb-Free, Tape and Reel"
J2: "Header, 2x20-Pin, Dual row, Metric"
J3: "Low Voltage Power Supply Connector, 2.1 mm"
J4 J5: library part "Header 2", "Header, 2-Pin"
J6: library part "Header 6", "Header, 6-Pin"
J500 J501 J600 J601: "ONN FFC BOTTOM 24POS 0.50MM R/A"
POWER RESET SW1 SW2 SW3 SW4: "Tactile Switch"
R1 R2 R8 R10 R11 R12 R13 R14 R15 R16 R17: library part Res3, "0O Resistor"
R3 R4 R5 R6 R7 R9 R100 R101 R102 R103 R104 R105 R300 R301 R302 R303 R304 R350 R351: library part CRCW0402xxxxFKED, "0.125W, -55-155C, 1005, 50V, ±1%"
U1: "1.1 A, Low Noise, Low Dropout Linear Regulator, 1.8 to 20 V Vin, 3.3 V Vout, 8-pin SON (DD-8), -40 to 125 degC, Pb-Free, Tape and Reel"
U2 U3 U4 U5: "MOSFET N-CH 50V 0.2A 3VMT"
U100 U101 U102 U103 U104 U105: library part LP5912-x.x, "500-mA Low-Noise, Low-IQ LDO"
U300: library part CMP-2000-05129-1, "6-Axis Xtrinsic Sensor with Integrated Linear Accelerometer and Magnetometer, 1.95 to 3.6 V, -40 to 85 degC, 16-Pin QFN, RoHS, Tape and Reel"
U350: "3-Axis Digital Angular Rate  Gyroscope"
U400 U401: "CONN SOCKET P4 .4MM 24POS SMD"

## Via types
v1: diameter 18, hole 8, Top Signal to Bottom Signal, 235 vias
v2: diameter 24, hole 12, Top Signal to Bottom Signal, 28 vias
v3: diameter 19.68, hole 7.87, Top Signal to Bottom Signal, 12 vias

## Nets (pads, with @x,y where several pads share a name; then routed paths per layer and width w, separated by ;. In a path a pad name is that pad's centre, name@x,y a point inside that pad or via, vN(x,y) a via of type N, cw(c..) or ccw(c..) an arc to the next point about the centre after c; other vN are vias at no path point)
Net1V8_1: 1V8.1 J5.1 | length 965.3
  Top Signal w8: v1(3214.96,1865) 3280,1865 3296.5,1881.5 1V8.1@3296.5,1941
  Bottom Signal w5: J5.1@2700,1443.32 2700,1480 2754.91,1534.91 2810.12,1534.91 2975,1699.79 2975,1860 2995,1880 3199.96,1880 v1(3214.96,1865)
Net1V8_2: 1V8.2 R9.1 | length 42.8
  Top Signal w8: R9.1@3188.69,1939 1V8.2@3231.5,1939
Net3V3_1: 3V3.1 J4.1 | length 1111.6
  Top Signal w8: v1(3210,1995) 3285,1995 3293.5,2003.5 3V3.1@3293.5,2051
  Bottom Signal w5: J4.1@2700,1330 2750,1380 2750,1512.91 2760,1522.91 2815.09,1522.91 3138.68,1846.5 3222.62,1846.5 3233.46,1857.34 3233.46,1971.54 v1(3210,1995)
Net3V3_2: 3V3.2 R7.1 | length 48.5
  Top Signal w8: R7.1@3183.69,2047 3226.5,2047 3V3.2@3230.5,2051
NetC300_1: C300.1 U300.8 | length 82.3
  Top Signal w8: C300.1@1475.79,1641.78 1476.1,1641.46 1490.79,1641.46 1506.1,1626.15 U300.8@1506.1,1580.68
NetC301_1: C301.1 U300.2 | length 112.4
  Top Signal w8: U300.2@1575,1511.78 1640.47,1511.78 1655.79,1496.46 C301.1@1655.79,1471.15
NetC350_1: C350.1 U350.16 | length 188.3
  Top Signal w8: U350.16@983.8,1551.15 1064.63,1551.15 1094,1580.52 C350.1@1094,1646.46
NetIND1_1: IND1.1 R3.1 | length 63.5
  Top Signal w15: R3.1@985,129.68 1046.81,129.68 IND1.1@1048,128.5
NetIND1_2: IND1.2 U2.3 | length 180
  Top Signal w5: IND1.2@1048,65.5 1089.72,65.5 1094,69.79 1094,161 U2.3@1065,190
NetIND2_1: IND2.1 R4.1 | length 58
  Top Signal w15: R4.1@1145.79,129.68 1146.98,128.5 IND2.1@1203.33,128.5
NetIND2_2: IND2.2 U3.3 | length 197.3
  Top Signal w5: IND2.2@1203.33,65.5 1254.24,65.5 1259.84,71.1 1259.84,145.16 1226.5,178.5 U3.3@1226.5,195.75
NetIND3_1: IND3.1 R5.1 | length 57.2
  Top Signal w15: R5.1@1300,134.68 1355.48,134.68 IND3.1@1356.67,133.5
NetIND3_2: IND3.2 U4.3 | length 187.2
  Top Signal w5: IND3.2@1356.67,70.5 1399.4,70.5 1405,76.1 1405,166.85 U4.3@1372.6,199.25
NetIND4_1: IND4.1 R6.1 | length 56.6
  Top Signal w15: R6.1@1470,124.68 1521.19,124.68 IND4.1@1525,128.5
NetIND4_2: IND4.2 U5.3 | length 230
  Top Signal w5: IND4.2@1525,65.5 1584.72,65.5 1595,75.79 1595,164.8 1564.8,195 U5.3@1540.75,195
NetJ6_3: J6.3 R11.1 | length 417.2
  Top Signal w5: J6.3@2095,86 2166.5,14.5 2345,14.5 2345.5,15 2415,15 2420.63,20.63 R11.1@2420.63,80
NetJ6_4: J6.4 R10.1 | length 502.6
  Top Signal w5: J6.4@1995,86 1995,135.39 2044.61,185 R10.1@2420.63,185
  Bottom Signal w15: J6.4@1990,91 J6.4@1995,86
NetJ6_5: J6.5 R8.1 | length 635.9
  Top Signal w5: J6.5@1895,86 1895,130 1965,200 2260,200 2350,290 R8.1@2420.63,290
NetJ600_9: J600.9 | length 167.3
  Top Signal w5: v1(2928.74,1396.26) J600.9@3096.02,1396.26
NetJ600_17: J600.17 | length 69.8
  Top Signal w5: v1(3026.26,1553.74) J600.17@3096.02,1553.74
NetJ600_19: J600.19 TP503.1 | length 677.4
  Top Signal w5: TP503.1@2540,1405 2540,1479.15 2575.85,1515 2844.48,1515 2922.59,1593.11 J600.19@3096.02,1593.11
NetJ600_21: J600.21 TP502.1 | length 313.6
  Top Signal w5: TP502.1@3015,1830 2985,1800 2985,1645 2994.61,1635.39 3042.13,1635.39 3045.04,1632.48 J600.21@3096.02,1632.48
NetJ600_23: J600.23 TP501.1 | length 369.5
  Top Signal w8: TP501.1@3015,1935 3065,1935 3080,1920 3080,1779.92 3054.29,1754.21 3054.29,1675.71 3058.15,1671.85 J600.23@3096.02,1671.85
NetJ600_24: J600.24 TP500.1 | length 377
  Top Signal w8: TP500.1@3015,2035 3096.02,1953.98 J600.24@3096.02,1691.54
NetJ601_9: J601.9 TP511.1 | length 438.8
  Top Signal w5: J601.9@248.98,1750.63 253.26,1754.91 571.12,1754.91 585.71,1769.5 614.29,1769.5 628.79,1755 TP511.1@674,1755
NetJ601_17: J601.17 TP510.1 | length 356.3
  Top Signal w5: J601.17@248.98,1593.15 250.98,1591.15 603.04,1591.15 TP510.1@604.02,1592.13
NetJ601_19: J601.19 | length 112.2
  Top Signal w5: J601.19@248.98,1553.78 v1(361.22,1553.78)
NetJ601_21: J601.21 | length 71
  Top Signal w5: J601.21@248.98,1514.41 v1(319.96,1514.41)
NetJ601_23: J601.23 | length 96.1
  Top Signal w5: J601.23@248.98,1475.04 v1(345.04,1475.04)
NetJ601_24: J601.24 | length 120.4
  Top Signal w5: J601.24@248.98,1455.35 v1(369.41,1455.35)
NetR1_1: R1.1 R2.1 U1.6 | length 194
  Top Signal w8: U1.6@2165.12,913.16 2219.21,913.16 2240,892.37 R2.1@2245,892.37 2348.74,892.37 R1.1@2350,893.63
NetR100_2: R100.2 U100.3 | length 51.1
  Top Signal w8: R100.2@2585,953.66 2595.91,942.76 U100.3@2631.61,942.76
NetR101_2: R101.2 U101.3 | length 51.1
  Top Signal w8: R101.2@2581,1135.38 2591.91,1124.47 U101.3@2627.61,1124.47
NetR102_2: R102.2 U102.3 | length 51.1
  Top Signal w8: R102.2@2583,743.31 2593.91,732.41 U102.3@2629.61,732.41
NetR103_2: R103.2 U103.3 | length 51.1
  Top Signal w8: R103.2@2579,549.9 2589.91,538.99 U103.3@2625.61,538.99
NetR104_2: R104.2 U104.3 | length 35.5
  Top Signal w15: R104.2@2085,418.82 2094.41,409.41 U104.3@2116.61,409.41
NetR105_2: R105.2 U105.3 | length 42.9
  Top Signal w15: R105.2@2090,615.31 2128.43,615.31 U105.3@2131.61,612.13
NetR302_2: R302.2 U300.16 | length 66.1
  Top Signal w8: R302.2@1545.47,1416.15 U300.16@1545.47,1482.25
NetR350_2: R350.2 U350.4 | length 103.5
  Top Signal w8: R350.2@729,1550.52 729.63,1551.15 U350.4@832.23,1551.15
sAG_SA0: R303.1 U300.7 | length 91.1
  Top Signal w8: U300.7@1525.79,1580.68 R303.1@1525.79,1671.78
sAG_SA1: R304.1 U300.10 | length 111.6
  Top Signal w8: R304.1@1375.47,1576.46 1400.79,1576.46 1426.1,1551.15 U300.10@1476.57,1551.15
SCAM0_DATA0_N: J1.10 J1.44 J500.10 J501.10 J600.20 J601.20 U400.22 U401.22 | length 8307.9
  Top Signal w5: U401.22@163.88,319.55 163.88,343.7 169.63,349.45 169.63,442.6 237.03,510 333.25,510 348.25,525 443.28,525 470,498.28 470,409.41 479.41,400 v1(500,400) ; J501.10@248.98,929.06 324.51,929.06 325.46,930 342.02,930 342.97,929.06 v1(387.72,929.06) ; J601.20@248.98,1534.09 326.44,1534.09 336.12,1524.41 387.2,1524.41 v1(393.7,1530.91) ; v1(2840,338.5) 2846.5,345 3054.29,345 3069.88,329.41 U400.22@3069.88,300.55 ; v1(2995,695) 3001.97,701.97 J500.10@3097.05,701.97 3263.47,701.97 v1(3286.5,725) ; v1(3015,1615.98) 3021.5,1622.48 3028.88,1622.48 3038.56,1612.8 J600.20@3096.02,1612.8
  Inner Layer 1 w5: v1(387.72,929.06) 387.72,895.87 365.35,873.5 343.39,873.5 326.89,890 280,890 280,558.35 328.35,510 342.74,510 355.74,523 394.26,523 421.5,495.76 421.5,478.5 v1(500,400) ; v1(1494.85,946.69) 1494.85,924.85 1488.35,918.35 1488.35,700.63 1494.09,694.88 1480,680.79 1480,665 1495,650 1811.09,650 1822.48,661.39 1866.49,661.39 1877.88,650 1953.21,650 1963.18,640.03 2138.33,640.03 2150.66,652.36 2150.66,667.38 2161.99,678.71 2178.01,678.71 2189.34,667.38 2189.34,652.36 2191.7,650 2805.55,650 2824.05,668.5 2831.25,668.5 2835.9,673.15 2835.9,681.86 2863.14,709.1 2923.29,709.1 2937.36,723.17 2959.31,723.17 2974.83,707.64 2974.83,695 v1(2995,695)
  Inner Layer 2 w5: v1(387.72,929.06) 410,929.06 456.5,975.56 456.5,1110.49 381.98,1185 256.72,1185 230,1211.72 230,1492.69 261.72,1524.41 303.8,1524.41 312.3,1532.91 391.7,1532.91 v1(393.7,1530.91) ; v1(500,400) 506.5,393.5 915,393.5 935,413.5 935,791.38 903.5,822.88 903.5,858.5 930,885 v1(959.41,885) ; v1(2840,338.5) 2850.75,349.25 2928.33,349.25 2962.52,383.44 2962.52,542.48 v1(2950,555) ; v1(3015,1615.98) 3017,1613.98 3052.7,1613.98 3054.7,1615.98 3279.02,1615.98 3310.5,1584.5 3310.5,749 v1(3286.5,725)
  Bottom Signal w5: J1.10@958.66,694.88 958.66,884.25 v1(959.41,885) ; J1.44@1494.09,694.88 1494.09,945.94 v1(1494.85,946.69) ; v1(2950,555) 2928.33,576.67 2928.33,582.55 2941.5,595.72 2941.5,630.98 2995,684.48 v1(2995,695)
SCAM0_DATA0_P: J1.8 J1.42 J500.11 J501.11 J600.22 J601.22 U400.20 U401.20 | length 8412.2
  Top Signal w5: U401.20@195.38,319.55 195.38,343.7 189.63,349.45 189.63,434.32 245.32,490 341.54,490 356.54,505 435,505 450,490 450,401.13 484.13,367 v1(500,367) ; J501.11@248.98,909.37 345,909.37 v1(354.37,900) ; J601.22@248.98,1494.72 326.44,1494.72 336.12,1504.41 387.2,1504.41 v1(393.7,1497.91) ; v1(2840,380) 2840,371.5 2846.5,365 3070,365 3101.38,333.62 U400.20@3101.38,300.55 ; v1(2948.33,696.67) 2973.32,721.65 J500.11@3097.05,721.65 3250.16,721.65 3260,731.5 3260,740 3275,755 3296.35,755 3325,726.35 3325,716.83 v1(3309.83,701.67) ; v1(3018.18,1655.39) 3018.18,1652.17 J600.22@3096.02,1652.17
  Inner Layer 1 w5: v1(354.37,900) 344.37,910 266.57,910 260,903.43 260,550.07 320.07,490 351.02,490 364.02,503 385.98,503 401.5,487.48 401.5,461.02 495.52,367 v1(500,367) ; v1(1465,977.56) 1465,933.35 1468.35,930 1468.35,700.63 1462.6,694.88 1462.6,691.67 1460,689.07 1460,656.72 1486.72,630 1819.38,630 1830.77,641.39 1858.21,641.39 1879.57,620.03 2146.61,620.03 2161.99,635.41 2178.01,635.41 2188.87,624.55 2194.32,630 2813.84,630 2832.34,648.5 2845.39,648.5 2855.9,659.01 2855.9,673.58 2871.43,689.1 2931.57,689.1 2939.14,696.67 v1(2948.33,696.67)
  Inner Layer 2 w5: v1(354.37,900) 409.23,900 476.5,967.27 476.5,1118.77 390.27,1205 265,1205 250,1220 250,1484.41 270,1504.41 303.8,1504.41 312.3,1495.91 391.7,1495.91 v1(393.7,1497.91) ; v1(500,367) 506.5,373.5 923.28,373.5 955,405.22 955,820 v1(930,845) ; v1(2840,380) 2850.75,369.25 2920.05,369.25 2935,384.2 v1(2935,510) ; v1(3018.18,1655.39) 3018.18,1652.17 3017,1650.98 3018.18,1650.98 3272.3,1650.98 3330.5,1592.78 3330.5,722.33 v1(3309.83,701.67)
  Bottom Signal w5: J1.8@927.17,694.88 927.17,820.85 930,823.68 v1(930,845) ; J1.42@1462.6,694.88 1462.6,945.94 1465,948.34 v1(1465,977.56) ; v1(2935,510) 2930,515 2927.93,515 2900,542.93 2900,597.52 2888.5,609.02 2888.5,630.98 2904.02,646.5 2904.57,646.5 2904.57,647.3 2908.9,651.62 2908.9,657.23 v1(2948.33,696.67)
SCAM0_DATA1_N: J1.16 J600.12 U400.14 | length 4675.9
  Top Signal w5: v1(2860,235) 2915,235 2950,200 3185,200 3195.87,210.87 U400.14@3195.87,300.55 ; v1@2960,1465 2955,1460 v1(2955,1458.5) 2961.5,1465 3018.88,1465 3028.56,1455.31 J600.12@3096.02,1455.31
  Inner Layer 1 w5: v1(2860,235) 3058.84,235 3075.34,251.5 3090.66,251.5 3107.16,235 3196.72,235 3230,268.28 3230,363.84 3243.5,377.34 3243.5,392.66 3155,481.16 3155,1390.15 3080.15,1465 3051.12,1465 3042.66,1456.54 2956.96,1456.54 v1(2955,1458.5)
  Inner Layer 2 w5: v1(1053.9,885) 1068.9,900 1790,900 2450,240 2855,240 v1(2860,235)
  Bottom Signal w5: J1.16@1053.15,694.88 1053.15,884.25 v1(1053.9,885)
SCAM0_DATA1_P: J1.14 J600.14 U400.12 | length 4742.7
  Top Signal w5: v1(2895,205) 2920,180 3193.28,180 3214.96,158.32 U400.12@3214.96,119.45 ; v1(2955,1491.5) 2961.5,1485 3018.8,1485 3028.48,1494.68 J600.14@3096.02,1494.68
  Inner Layer 1 w5: v1(2895,205) 3195,205 3250,260 3250,355.55 3263.5,369.05 3263.5,400.95 3175,489.45 3175,1398.43 3088.43,1485 3051.2,1485 3042.66,1493.54 2957.04,1493.54 v1(2955,1491.5)
  Inner Layer 2 w5: v1(1020.9,885) 1020.9,889.48 1051.42,920 1798.28,920 2458.28,260 2780,260 2781.5,261.5 2870.98,261.5 2886.5,245.98 2886.5,213.5 v1(2895,205)
  Bottom Signal w5: v1(1020.9,885) 1021.65,884.25 J1.14@1021.65,694.88
sCAM0_SCL: J500.3 J600.5 R12.2 U400.5 | length 1950.3
  Top Signal w5: R12.2@2784.37,184.63 2820.37,184.63 v1(2873.63,131.37) 2904.4,131.37 2941.03,168 3092,168 3101.38,158.62 U400.5@3101.38,119.45 ; v1(2932.8,1305) 2945.32,1317.52 J600.5@3096.02,1317.52 ; v1(2980.41,564.17) J500.3@3097.05,564.17
  Inner Layer 2 w5: v1(2873.63,131.37) 2943.5,201.24 2943.5,307.66 2980.41,344.57 v1(2980.41,564.17) 2966.5,578.08 2966.5,711.81 2966.76,712.06 2966.76,744.98 2962.52,749.22 2962.52,772.83 2966.76,777.06 2966.76,820.11 2957.92,828.95 2956.82,828.95 2938.95,846.82 2938.95,872.08 2960,893.13 2960,1232.93 2922.44,1270.49 2922.44,1285.81 2932.8,1296.16 v1(2932.8,1305)
sCAM0_SDA: J500.2 J600.3 R14.2 U400.3 | length 1925.6
  Top Signal w5: R14.2@2784.37,80 2870,80 v1(2895,105) 2946,156 3062.16,156 3069.88,148.28 U400.3@3069.88,119.45 ; v1(2940.94,1278.15) J600.3@3096.02,1278.15 ; v1(3020,515) 3020,521.01 2996.52,544.49 J500.2@3097.05,544.49
  Inner Layer 2 w5: v1(2895,105) 2980.5,190.5 2980.5,307.66 2978.76,309.41 2978.76,327.36 2991.41,340.02 2991.41,486.41 v1(3020,515) 3020,525.79 2998.91,546.88 2998.91,571.84 2977.5,593.25 2977.5,707.25 2978.76,708.51 2978.76,717.41 2977.76,718.41 2977.76,749.54 2973.52,753.77 2973.52,768.27 2977.76,772.51 2977.76,824.67 2972,830.42 2972,831.84 2962.89,840.95 2961.79,840.95 2950.95,851.79 2950.95,867.11 2972,888.16 2972,1247.09 v1(2940.94,1278.15)
SCAM1_DATA1_N: J1.50 J601.14 U401.14 | length 4027.2
  Top Signal w5: J601.14@248.98,1652.2 342.59,1652.2 352.27,1661.89 375.35,1661.89 v1(381.85,1655.39) ; U401.14@289.87,319.55 289.87,249.09 313.96,225 378.5,225 v1(385,231.5)
  Inner Layer 1 w5: v1(381.85,1655.39) 375.35,1661.89 370.87,1661.89 366.3,1666.46 217.63,1666.46 207.66,1656.5 200,1656.5 200,483.28 215,468.28 215,338.28 321.78,231.5 v1(385,231.5)
  Inner Layer 2 w5: v1(385,231.5) 458.5,305 1535.47,305 1550,319.53 1550,433.03 1550.08,433.11 1550.08,801.18 1530.59,820.67 1530.59,845.98 1554.61,870 v1(1589.33,870)
  Bottom Signal w5: J1.50@1588.58,694.88 1588.58,869.25 v1(1589.33,870)
SCAM1_DATA1_P: J1.48 J601.12 U401.12 | length 4005
  Top Signal w5: J601.12@248.98,1691.57 342.59,1691.57 352.27,1681.89 375.35,1681.89 v1(381.85,1688.39) ; U401.12@308.96,138.45 308.96,191.8 317.17,200 317.24,200 322.24,205 378.5,205 v1(385,198.5)
  Inner Layer 1 w5: v1(381.85,1688.39) 308.39,1688.39 306.46,1686.46 214.7,1686.46 207.66,1693.5 183.5,1693.5 180,1690 180,475 195,460 195,330 326.5,198.5 v1(385,198.5)
  Inner Layer 2 w5: v1(385,198.5) 389.48,198.5 411.5,220.52 411.5,225 471.5,285 1555,285 1570,300 1570,424.74 1570.08,424.83 1570.08,819.92 1557.09,832.91 v1(1557.09,835)
  Bottom Signal w5: J1.48@1557.09,694.88 v1(1557.09,835)
SCAM1_MCLOCK_N: J1.4 J1.56 J500.7 J501.7 J600.16 J601.16 U400.18 U401.18 | length 8291.1
  Top Signal w5: U401.18@226.87,319.55 226.87,343.7 232.62,349.45 232.62,438.28 264.34,470 368.5,470 v1(375,476.5) ; J501.7@248.98,988.11 v1(341.65,988.11) v1@345.04,991.5 ; J601.16@248.98,1612.83 386.82,1612.83 v1(390,1609.65) ; v1(2848.5,420) 2848.5,415.52 2852.52,411.5 2855,411.5 2855,409.02 2870.52,393.5 2871.5,393.5 2871.5,385 3078.28,385 3083.28,380 3092.87,380 3132.87,340 U400.18@3132.87,300.55 ; v1(2915,620) 2915,637.72 2920.2,642.91 J500.7@3097.05,642.91 ; v1(2970,1537.24) 2976.5,1543.74 3010.1,1543.74 3019.78,1534.06 J600.16@3096.02,1534.06
  Inner Layer 1 w5: v1(341.65,988.11) 321.54,968 310.28,968 274.81,932.53 260.81,932.53 240,911.72 240,541.78 311.78,470 368.5,470 v1(375,476.5) ; v1(2848.5,420) 2823.28,420 2775,371.72 2775,200 2796.5,178.5 3128.87,178.5 3135.37,185 3203.28,185 3292,273.72 3292,400.73 3200,492.73 3200,1401.72 3064.48,1537.24 3035.92,1537.24 3033.92,1535.24 2972,1535.24 v1(2970,1537.24)
  Inner Layer 2 w5: v1(341.65,988.11) 341.65,989.13 379.02,1026.5 403,1026.5 416.5,1040 416.5,1093.92 365.42,1145 236.72,1145 190,1191.72 190,1563.28 238.37,1611.65 388,1611.65 v1(390,1609.65) ; v1(375,476.5) 381.5,470 745.2,470 820,544.8 820,806.38 806.18,820.2 806.18,855.98 821.7,871.5 851.43,871.5 v1(864.93,885) ; v1(1683.82,995) 1808.14,995 1823.14,980 1941.57,980 2096.58,824.99 2126.99,794.58 2221.57,700 2635,700 2846.5,488.5 2846.5,428.5 v1@2855,420 ; v1(2848.5,420) 2848.5,415.52 2852.52,411.5 2855,411.5 2855,409.02 2870.52,393.5 2908.5,393.5 2908.5,613.5 v1(2915,620)
  Bottom Signal w5: J1.4@864.17,694.88 864.17,884.25 v1(864.93,885) ; J1.56@1683.07,694.88 1683.07,994.25 v1(1683.82,995)
SCAM1_MCLOCK_P: J1.2 J1.54 J500.8 J501.8 J600.18 J601.18 U400.16 U401.16 | length 8477.1
  Top Signal w5: J501.8@248.98,968.43 358.43,968.43 v1(390,1000) ; J601.18@248.98,1573.46 386.81,1573.46 390,1570.28 v1(390,1570) ; U401.16@258.37,319.55 258.37,343.7 252.62,349.45 252.62,430 272.62,450 368.5,450 v1(375,443.5) ; v1(2881.5,420) 2896.5,405 3086.57,405 3091.57,400 3119.37,400 3164.37,355 U400.16@3164.37,300.55 ; v1(2882.4,662.6) J500.8@3097.05,662.6 ; v1(2970,1570.24) 2976.5,1563.74 3010.1,1563.74 3019.78,1573.43 J600.18@3096.02,1573.43
  Inner Layer 1 w5: v1(375,443.5) 368.5,450 303.5,450 220,533.5 220,920 252.53,952.53 266.53,952.53 328.61,1014.61 375.39,1014.61 v1(390,1000) ; v1(2881.5,420) 2881.5,434 2871.98,434 2859.48,446.5 2837.52,446.5 2831.02,440 2815,440 2755,380 2755,191.72 2788.22,158.5 3142.64,158.5 3149.14,165 3211.57,165 3312,265.44 3312,409.01 3225,496.02 3225,1405 3057.76,1572.24 2972,1572.24 v1(2970,1570.24)
  Inner Layer 2 w5: v1(375,443.5) 381.5,450 753.48,450 840,536.52 840,814.66 832.68,821.98 v1(832.68,845) ; v1(390,1000) 400,990 424.78,990 436.5,1001.72 436.5,1102.2 373.7,1165 245,1165 210,1200 210,1555 231.65,1576.65 330.3,1576.65 332.3,1574.65 388,1574.65 390,1572.65 v1(390,1570) ; v1(1651.57,1025) 1806.42,1025 1831.42,1000 1949.85,1000 2229.85,720 2658.41,720 2660.4,718 2675.6,718 2677.59,720 2749.01,720 2827.13,641.88 2822.5,637.25 2822.5,622.75 2832.75,612.5 2847.25,612.5 2851.88,617.13 2866.5,602.51 2866.5,599.22 ; v1(2882.4,662.6) 2882.4,615.12 2866.5,599.22 ; v1@2885,420 v1(2881.5,420) 2875.76,420 2875.64,420.12 2880.26,424.74 2875,430 2875,430.98 2866.5,439.48 2866.5,599.22
  Bottom Signal w5: J1.2@832.68,694.88 v1(832.68,845) ; J1.54@1650,693.31 J1.54@1651.57,694.88 v1(1651.57,1025)
sCAM1_SCL: J501.3 J601.5 R13.2 R15.2 U401.5 | length 3074.5
  Top Signal w5: v1(45,1065) 46.85,1066.85 J501.3@248.98,1066.85 ; v1(195,40) v1@195.38,40 ; U401.5@195.38,138.45 v1@195.38,40 ; J601.5@248.98,1829.37 324.37,1829.37 355,1860 v1(393.7,1860) ; R15.2@580,55.63 R13.2@475,55.63 474.37,55 390,55 375,40 v1@195.38,40
  Inner Layer 1 w5: v1(195,40) 195,120 177,138 177,178.6 167.8,187.8 60,295.6 60,631.87 49.5,642.37 49.5,651.56 45,656.06 v1(45,1065) 45,1068.84 58.5,1082.34 58.5,1097.66 45,1111.16 45,1818.94 53.06,1827 53.06,1827.18 50.87,1829.37 324.37,1829.37 355,1860 v1(393.7,1860)
sCAM1_SDA: J501.2 J601.3 R16.2 R17.2 U401.3 | length 3258.4
  Top Signal w5: v1(40,1090) 43.46,1086.54 J501.2@248.98,1086.54 ; U401.3@163.88,138.45 163.88,36.12 185.5,14.5 614.5,14.5 651.63,51.63 692,51.63 693,52.63 R16.2@796,52.63 ; J601.3@248.98,1868.74 v1(333.74,1868.74)
  Inner Layer 1 w5: v1(40,1090) 14.5,1090 ; v1(165,55) 165,173.63 14.5,324.13 14.5,1090 ; v1(333.74,1868.74) 43.24,1868.74 14.5,1840 14.5,1090
sCSI0_XCLOCK/sCAM0_XCLOCK: J1.15 J500.5 J600.13 U400.13 | length 4090.9
  Top Signal w5: v1(3000,605) 3000.27,604.73 3034.83,604.73 3035.1,605 3095.59,605 J500.5@3097.05,603.54 3098.5,605 v1(3290,605) ; v1(3035,1475.04) v1(3035,1475.04) J600.13@3096.02,1475 ; U400.13@3214.96,300.55 3272.95,300.55 v1(3273.5,300)
  Inner Layer 1 w5: v1(1053.15,390) 1063.15,380 v1(1120,380) ; v1(1775,390) 1815.77,390 1925.77,500 2080,500 2176.72,596.72 2178.01,596.72 2194.79,613.5 2664.09,613.5 2676.09,601.5 2996.5,601.5 v1(3000,605)
  Inner Layer 2 w5: v1(3035,1475.04) 3273.46,1475.04 3298.5,1450 3298.5,764.53 3261.99,728.01 3261.99,633.01 v1(3290,605) 3330.5,564.5 3330.5,357 v1(3273.5,300)
  Bottom Signal w5: v1(1120,380) 1140,380 1153.5,393.5 1771.5,393.5 v1(1775,390)
  Bottom Signal w8: v1(1053.15,390) J1.15@1053.15,521.65